# Altium PCB rs232_pic_print.PcbDoc
Units mm, origin at the board's own origin, x right, y up, seen from the top; angles counter-clockwise.
Board outline 152.4 x 101.6 mm, 2 copper layers (Top Layer, Bottom Layer); 39 components, 57 nets, 200 pads, 0 vias.
Unrouted connection lines stored in the file: 12.
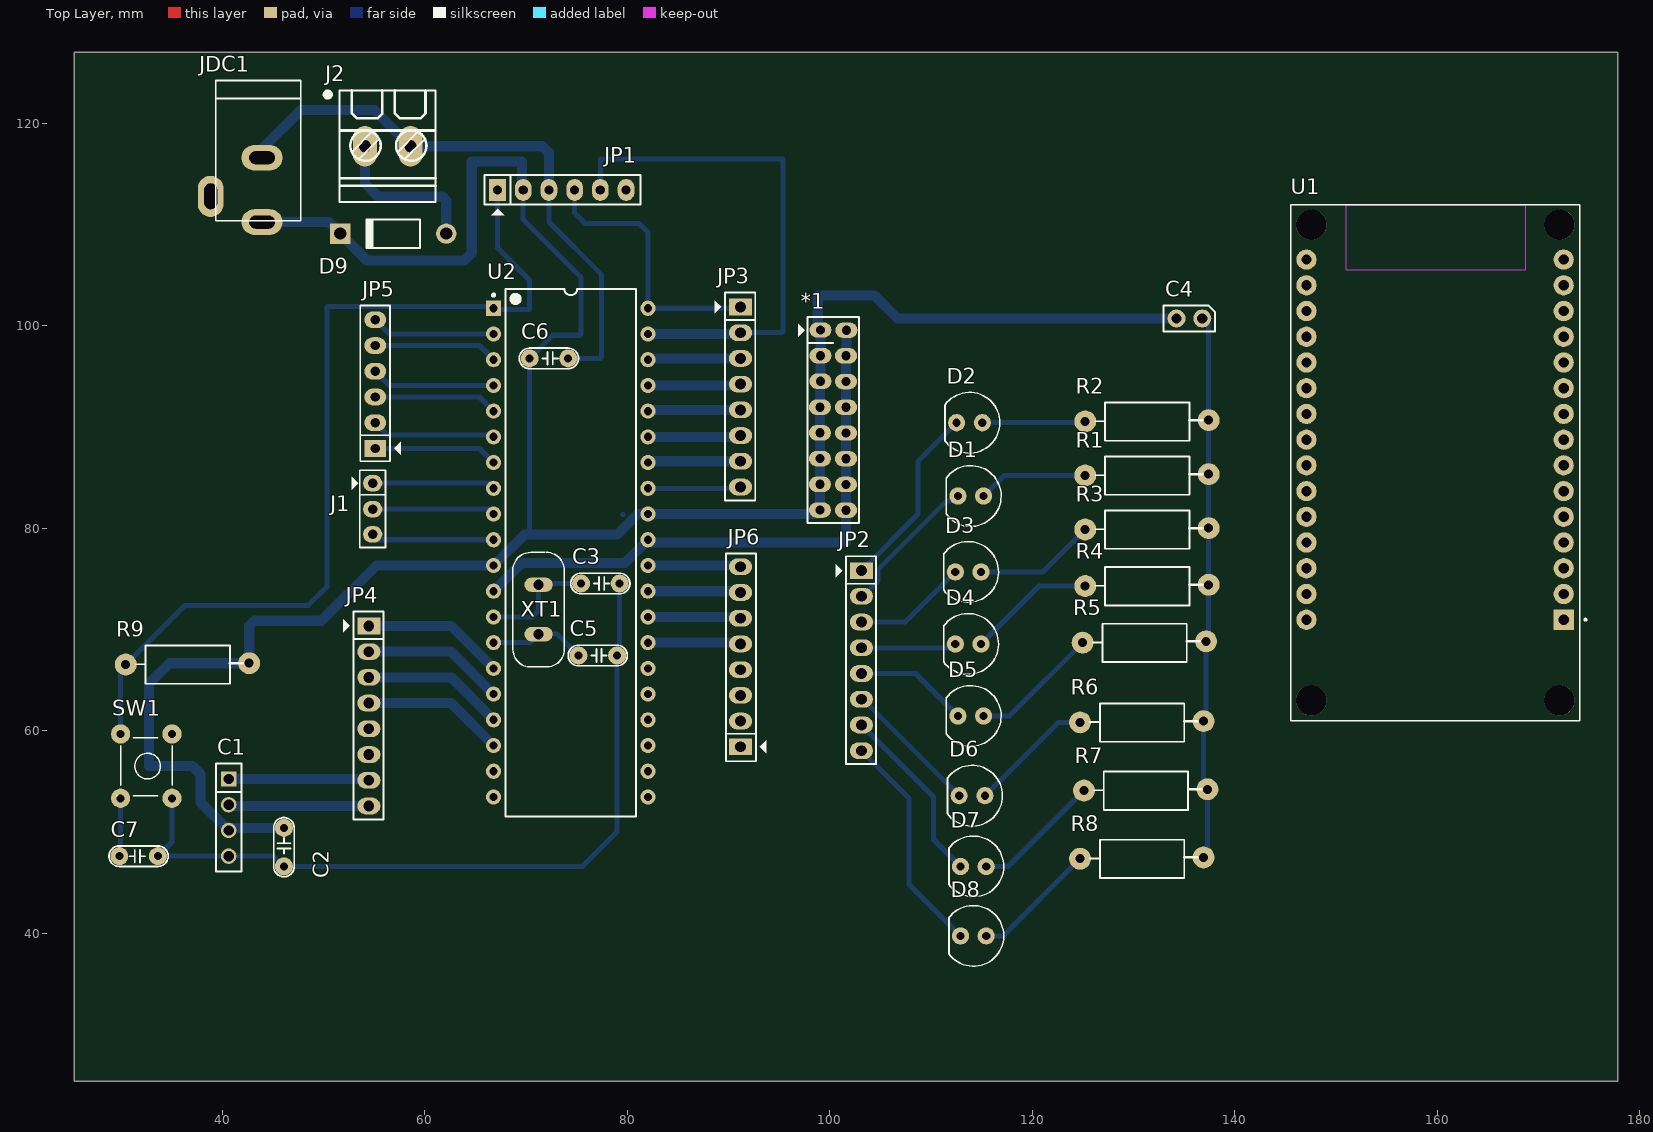
[diagram p0: Top Layer view]
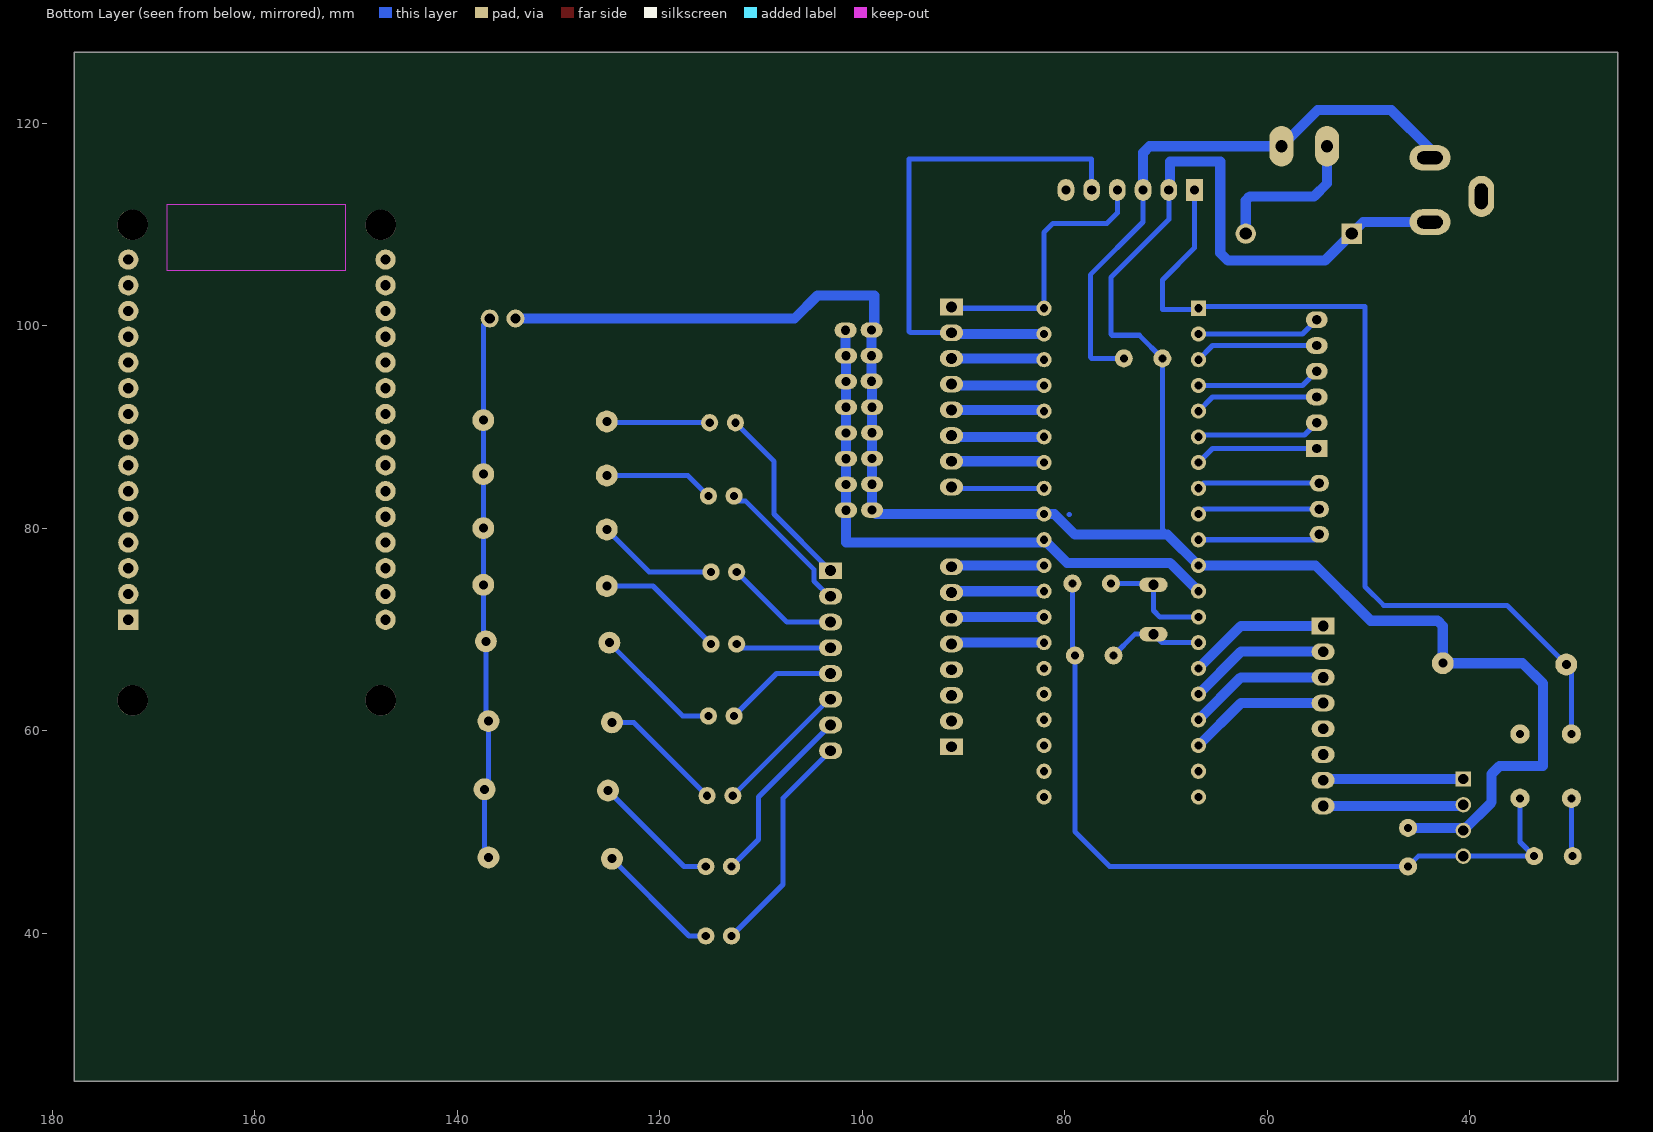
[diagram p1: Bottom Layer view, seen from below]
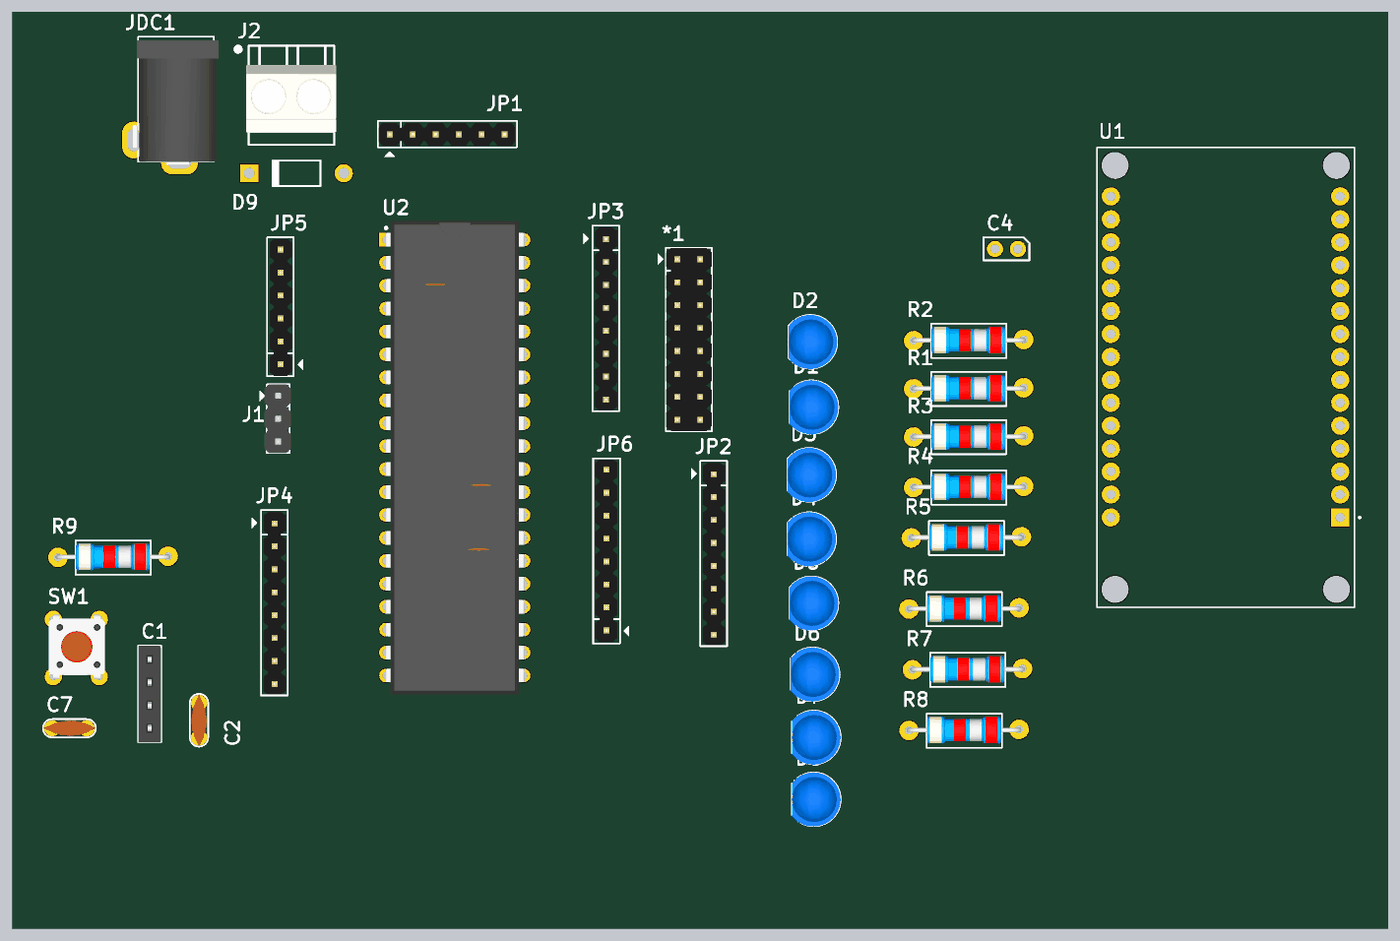
[diagram p2: 3D render of the assembled board from above, using the file's embedded part models]

## Layer stack, top to bottom
Top Solder: solder mask 0.0102, Solder Resist, Dk 3.5
Top Layer: signal copper 0.0356
Dielectric 1: dielectric 0.32, FR-4, Dk 4.8
Bottom Layer: signal copper 0.0356
Bottom Solder: solder mask 0.0102, Solder Resist, Dk 3.5

## Board outline
25.4,25.4 177.8,25.4 177.8,127 25.4,127

## Design rules (kind name [scope] priority, off if disabled: settings)
Clearance [All] p1: gap=0.254
PolygonConnect [All] p1: connectstyle=Relief reliefconductorwidth=0.254 reliefentries=4 polygonreliefangle="90 Angle" airgapwidth=0.254
RoutingLayers [All] p1: top layer_v5=FALSE bottom layer_v5=TRUE
RoutingVias [All] p1: holewidth=0.711 width=1.27 viastyle="Through Hole" minholewidth=0.711 minwidth=1.27 maxholewidth=0.711 maxwidth=1.27
SolderMaskExpansion [All] p1: expansion=0.102
Width [All] p1: maxlimit=3 minlimit=0.5 preferedwidth=1
29 further rules are at their usual default settings.

## Components (designator, comment, footprint, x,y, rotation, side; value= is the part's Value field where it differs from the comment)
*1 "JP8X2" JP8X2 99.06,99.568 r270 top
C1 "JP4" JP4-C1T 40.64,55.245 r270 top
C2 "103" CN1.5 46.101,48.641 r270 top
C3 "22p" CN1.5 77.47,74.549 r180 top
C4 "JP2" JP2-CLOSED 136.779,100.711 r270 top
C5 "22p" CN1.5 77.216,67.437 r180 top
C6 "103" CN1.5 72.39,96.774 r180 top
C7 "103" CN1.5 31.623,47.625 r0 top
D1 "LED" "LED-0 5mm BLUE" 113.919,83.185 r270 top
D2 "LED" "LED-0 5mm BLUE" 113.792,90.424 r270 top
D3 "LED" "LED-0 5mm BLUE" 113.665,75.692 r270 top
D4 "LED" "LED-0 5mm BLUE" 113.665,68.58 r270 top
D5 "LED" "LED-0 5mm BLUE" 113.919,61.468 r270 top
D6 "LED" "LED-0 5mm BLUE" 114.046,53.594 r270 top
D7 "LED" "LED-0 5mm BLUE" 114.173,46.609 r270 top
D8 "LED" "LED-0 5mm BLUE" 114.173,39.751 r270 top
D9 "Diode 1N4007" DO-41 56.896,109.093 r180 top
J1 "Jumper 3" JP3 54.864,81.915 r270 top
J2 "CON.Domino2" "Domino 2M" 61.077,112.229 r90 top
JDC1 "Jac DC" DC0 41.402,113.411 r270 top
JP1 "JP6 PIN" JP6 67.183,113.411 r0 top
JP2 "JP8 PIN" JP8 103.124,75.819 r270 top
JP3 "JP8 PIN" JP8 91.186,101.854 r270 top
JP4 "JP8 PIN" JP8 54.483,70.358 r270 top
JP5 "JP6 PIN" JP6 55.118,87.884 r90 top
JP6 "JP8 PIN" JP8 91.186,58.42 r90 top
R1 "220" RES-1/2W 131.826,85.217 r180 top
R2 "220" RES-1/2W 131.826,90.551 r180 top
R3 "220" RES-1/2W 131.826,79.883 r180 top
R4 "220" RES-1/2W 131.826,74.295 r180 top
R5 "220" RES-1/2W 131.572,68.707 r180 top
R6 "220" RES-1/2W 131.318,60.833 r180 top
R7 "220" RES-1/2W 131.699,54.102 r180 top
R8 "220" RES-1/2W 131.318,47.371 r180 top
R9 "Res" RES-1/2W 37.084,66.548 r180 top
SW1 "SW" SW2-DIP 35.052,59.69 r270 top
U1 "ESP32-DEVKIT-V1" MODULE_ESP32_DEVKIT_V1 159.766,86.487 r180 top
U2 "PIC16F877A-I/P" DIP-40 74.422,77.597 r0 top
XT1 "Crystal2" Crystal.HC49_N 71.247,69.545 r180 top

## Footprints (in the part's own frame and the unit in brackets; to place one, negate y for a bottom-side part, rotate by r counter-clockwise, add the part's x,y. Pads: shape width x height; smd on the part's side, far side on the other; paste and mask are expansions set on the pad)
CN1.5 [mil]
  round 70 hole 31: 1(-70,0) 2(80,0)
  silkscreen extent -110,-40 120,40, body extent -110,-33 120,33, height 235
Crystal.HC49_N [mil] "HC49USxx package"
  rrect100% 110x56 hole 40: 1(0,0) 2(0,-192)
  silkscreen extent -100,-318 100,127, body extent -90,-319 93,127, height 157
DC0 [mil] "Jac DC input"
  oval 100x160 hole 50 slot 100 at 90 deg: 1(125,100) 2(-125,100)
  oval 160x100 hole 50 slot 100 at 0 deg: 3(25,-100)
  silkscreen extent -425,-80 120,250, body extent -410,-105 134,269, height 434
DIP-40 [mm] "DIP, 40-Pin, Row Spacing 15.24 mm, Pitch 2.54 mm"
  rect 1.5x1.5 hole 0.813: 1(-7.62,24.13)
  round 1.5 hole 0.813: 2(-7.62,21.59) 3(-7.62,19.05) 4(-7.62,16.51) 5(-7.62,13.97) 6(-7.62,11.43) 7(-7.62,8.89) 8(-7.62,6.35) 9(-7.62,3.81) 10(-7.62,1.27) 11(-7.62,-1.27) 12(-7.62,-3.81) 13(-7.62,-6.35) 14(-7.62,-8.89) 15(-7.62,-11.43) 16(-7.62,-13.97) 17(-7.62,-16.51) 18(-7.62,-19.05) 19(-7.62,-21.59) 20(-7.62,-24.13) 21(7.62,-24.13) 22(7.62,-21.59) 23(7.62,-19.05) 24(7.62,-16.51) 25(7.62,-13.97) 26(7.62,-11.43) 27(7.62,-8.89) 28(7.62,-6.35) 29(7.62,-3.81) 30(7.62,-1.27) 31(7.62,1.27) 32(7.62,3.81) 33(7.62,6.35) 34(7.62,8.89) 35(7.62,11.43) 36(7.62,13.97) 37(7.62,16.51) 38(7.62,19.05) 39(7.62,21.59) 40(7.62,24.13)
  silkscreen extent -7.74,-26.05 6.45,26.05, body extent -7.75,-26.22 7.74,26.23, height 5.7
DO-41 [mm] "Diode, Axial; Body 5.2 x 2.7 mm (LxDia. max), Lead Dia. 0.86 mm (max)"
  round 2 hole 1.2: 1(-5.23,0)
  rect 2x2 hole 1.2: 2(5.23,0)
  silkscreen extent -2.65,-1.4 2.75,1.4
"Domino 2M" [mm]
  oval 4x2.4 hole 1.2: 1(5.5,6.975) 2(5.5,2.475)
  silkscreen extent 0,0 11,10.9, body extent 1.35,-0.22 8.85,9.78, height 10
JP2-CLOSED [mil]
  round 70 hole 40: 1(0,0) 2(0,-100)
  silkscreen extent -50,-150 50,50, body extent -50,-152 50,50, height 300
JP3 [mil] "Jumper 3"
  oval 65x75 hole 36: 1(-100,0) 2(1,0) 3(99,0)
  silkscreen extent -150,-81 150,50, body extent -150,-60 150,55, height 355
JP4-C1T [mm] "4 row, straight, gold plating"
  rect 1.52x1.52 hole 1.02: 1(0,0)
  round 1.52 hole 1.02: 2(2.54,0) 3(5.08,0) 4(7.62,0)
  silkscreen extent -1.52,-1.27 9.14,1.27, body extent -1.52,-1.25 9.14,1.25, height 8.51
JP6 [mil] "JP6"
  rect 65x85 hole 36: 1(0,0)
  oval 65x85 hole 36: 2(100,0) 3(200,0) 4(300,0) 5(400,0) 6(500,0)
  silkscreen extent -50,-99 556,58, body extent -48,-50 548,48, height 323
JP8 [mil] "JP8"
  rect 65x90 hole 42: 1(0,0)
  oval 65x90 hole 42: 2(100,0) 3(200,0) 4(300,0) 5(400,0) 6(500,0) 7(600,0) 8(700,0)
  silkscreen extent -56,-100 752,57, body extent -48,-50 748,48, height 323
JP8X2 [mil]
  oval 60x86 hole 36: 1(-0.5,0.5) 2(99.5,0.5) 3(198.5,0.5) 4(299.5,-1.5) 5(399.5,-1.5) 6(499.5,-1.5) 7(599.5,-1.5) 8(699.5,-1.5) 9(0.5,101.5) 10(100,100) 11(200,100) 12(300,100) 13(400,100) 14(500,100) 15(600,100) 16(700,100)
  silkscreen extent -51,-85 750,151, body extent -50,-50 750,150, height 335
"LED-0 5mm BLUE" [mil] "Typical LED; BLUE; 2 Leads; Solder Pad 35mil"
  round 67 hole 32: 1(0,50) 2(0,-50)
  silkscreen extent -118,-96 118,118, body extent -118,-96 119,117, height 345
MODULE_ESP32_DEVKIT_V1 [mm]
  rect 2x2 hole 1.02: 1(-12.7,15.515)
  round 2 hole 1.02: 2(-12.7,12.975) 3(-12.7,10.435) 4(-12.7,7.895) 5(-12.7,5.355) 6(-12.7,2.815) 7(-12.7,0.275) 8(-12.7,-2.265) 9(-12.7,-4.805) 10(-12.7,-7.345) 11(-12.7,-9.885) 12(-12.7,-12.425) 13(-12.7,-14.965) 14(-12.7,-17.505) 15(-12.7,-20.045) 16(12.7,-20.045) 17(12.7,-17.505) 18(12.7,-14.965) 19(12.7,-12.425) 20(12.7,-9.885) 21(12.7,-7.345) 22(12.7,-4.805) 23(12.7,-2.265) 24(12.7,0.275) 25(12.7,2.815) 26(12.7,5.355) 27(12.7,7.895) 28(12.7,10.435) 29(12.7,12.975) 30(12.7,15.515)
  round 3 hole 3 unplated: ""(-12.28,23.475) ""(-12.28,-23.475) ""(12.23,23.475) ""(12.23,-23.475)
  Keep-Out Layer region: 8.78,-25.475 -8.91,-25.475 -8.91,-18.985 8.78,-18.985
  Keep-Out Layer region: 8.78,-25.475 -8.91,-25.475 -8.91,-18.985 8.78,-18.985
  Keep-Out Layer region: 8.78,-25.475 -8.91,-25.475 -8.91,-18.985 8.78,-18.985
  silkscreen extent -14.95,-25.48 14.23,25.48
RES-1/2W [mil]
  round 85 hole 35: 1(-220,-5) 2(260,0)
  silkscreen extent -195,-74 221,75, body extent -230,-60 270,56, height 121
SW2-DIP [mil] "SW button 4pin, 250 x250 mil"
  round 75 hole 31: 1(0,0) 2(0,-200) 3(250,-200) 4(250,0)
  silkscreen extent 15,-215 240,0, body extent -36,-220 276,24, height 276

## Part data
C1 C4: "WR-PHD 2.54 mm Angled Socket Header"
C2 C3 C5 C6 C7: library part CN1.5, "Cap np 682pF => 104pF"
D1 D2 D3 D4 D5 D6 D7 D8: "Typical LED"
D9: "1 Amp General Purpose Rectifier"
J1: library part JP3
J2: "2 pins Domino Header"
JDC1: library part DCIN, "Jac DC input"
JP1 JP5: library part JP6
JP2 JP3 JP4 JP6: library part JP8
R1 R2 R3 R4 R5 R6 R7 R8: library part Res, "Res"
SW1: library part SW4, "Switch button 4 pin"
U1: "Dual core, Wi-Fi: 2.4 GHz up to 150 Mbits/s,BLE (Bluetooth Low Energy) and legacy Bluetooth, 32 bits, Up to 240 MHz"
U2: "Enhanced FLASH Microcontroller, 8K (x14-Bit words) FLASH, 368 Bytes RAM, 40-Pin PDIP, Standard VDD Range, Industrial Temperature"
XT1: "Quarz Crystal"

## Nets (pads, with @x,y where several pads share a name; then routed paths per layer and width w, separated by ;. In a path a pad name is that pad's centre, name@x,y a point inside that pad or via, vN(x,y) a via of type N, cw(c..) or ccw(c..) an arc to the next point about the centre after c; other vN are vias at no path point)
+5: *1.1 *1.2 *1.3 *1.4 *1.5 *1.6 *1.7 *1.8 C1.3 C2.1 C4.2 C6.2 D9.2 JDC1.1 JP1.2 R9.1 U2.11 U2.32 | length 238.8
  Bottom Layer w0.5: JP1.2 69.723,110.49 75.438,104.775 75.438,99.187 75.311,99.06 72.644,99.06 C6.2 70.358,79.883 69.85,79.375
  Bottom Layer w1: JDC1.1 50.523,110.236 D9.2 54.333,106.426 63.881,106.426 64.643,107.188 64.643,116.205 69.596,116.205 69.596,113.538 JP1.2 ; C2.1 40.894,50.419 C1.3 37.846,52.959 37.846,55.753 37.084,56.515 32.766,56.515 32.766,64.643 34.798,66.675 R9.1 42.672,70.358 43.18,70.866 49.784,70.866 55.245,76.327 U2.11 69.85,79.375 78.994,79.375 81.026,81.407 U2.32 98.628,81.407 *1.8 *1.7 *1.6 *1.5 *1.4 99.022,94.475 *1.3 *1.2 *1.1 98.806,99.847 98.806,102.997 104.394,102.997 106.68,100.711 C4.2
GND: C1.4 C2.2 C3.1 C5.1 C7.2 SW1.1 SW1.4 | length 78.1
  Bottom Layer w0.5: SW1.4 35.052,49.022 C7.2 C1.4 45.085,47.625 C2.2 75.565,46.609 78.994,50.038 C5.1 79.248,67.691 C3.1
Net*1_9: *1.9 *1.10 *1.11 *1.12 *1.13 *1.14 *1.15 *1.16 C6.1 J2.2 JDC1.2 JP1.3 U2.12 U2.31 | length 116.8
  Bottom Layer w0.254: JDC1.2 44.196,116.586 JDC1.2@44.45,116.332
  Bottom Layer w0.5: JP1.3 72.263,110.236 77.47,105.029 77.47,96.901 77.343,96.774 C6.1
  Bottom Layer w1: JDC1.2 43.942,117.475 47.752,121.285 55.046,121.285 J2.2 71.628,117.729 72.263,117.094 JP1.3 ; U2.12 69.596,76.581 79.756,76.581 U2.31 82.296,78.613 101.6,78.613 *1.16 *1.15 *1.14 *1.13 *1.12 *1.11 *1.10 101.638,97.066 *1.9
NetC1_1: C1.1 JP4.7 U2.25 | length 13.9
  Bottom Layer w1: C1.1 54.356,55.245 JP4.7
NetC1_2: C1.2 JP4.8 U2.26 | length 13.9
  Bottom Layer w1: C1.2 40.767,52.578 JP4.8
NetC3_2: C3.2 U2.13 XT1.2 | length 11.5
  Bottom Layer w0.5: U2.13 70.612,71.247 71.247,71.882 XT1.2 71.374,74.549 C3.2
NetC4_1: C4.1 R1.1 R2.1 R3.1 R4.1 R5.1 R6.1 R7.1 R8.1 | length 54
  Bottom Layer w0.5: C4.1 137.414,100.076 R2.1 R1.1 R3.1 R4.1 137.414,69.088 R5.1 137.16,61.214 R6.1 136.906,54.61 R7.1 137.287,47.879 R8.1
NetC5_2: C5.2 U2.14 XT1.1 | length 9.6
  Bottom Layer w0.5: U2.14 70.409,68.707 XT1.1 73.076,69.545 C5.2
NetC7_1: C7.1 JP1.1 R9.2 SW1.2 SW1.3 U2.1 | length 96.9
  Bottom Layer w0.5: C7.1 29.972,47.752 SW1.3 ; SW1.2 29.972,66.04 R9.2 36.322,72.39 48.514,72.39 50.36,74.236 50.36,101.913 66.802,101.913 U2.1 66.929,101.6 70.358,101.6 70.358,104.521 67.183,107.696 JP1.1
NetD1_1: D1.1 R1.2 | length 10.9
  Bottom Layer w0.5: D1.1 117.221,85.217 R1.2
NetD1_2: D1.2 JP2.2 | length 14.3
  Bottom Layer w0.5: JP2.2 103.265,73.279 104.771,74.785 104.771,75.942 111.506,82.677 112.141,82.677 D1.2
NetD2_1: D2.1 R2.2 | length 10.2
  Bottom Layer w0.5: D2.1 125.095,90.424 R2.2
NetD2_2: D2.2 JP2.1 | length 18.5
  Bottom Layer w0.5: JP2.1 108.712,81.407 108.712,86.614 D2.2
NetD3_1: D3.1 R3.2 | length 12
  Bottom Layer w0.5: D3.1 121.031,75.692 R3.2
NetD3_2: D3.2 JP2.3 | length 11.3
  Bottom Layer w0.5: JP2.3 107.442,70.739 D3.2
NetD4_1: D4.1 R4.2 | length 12.7
  Bottom Layer w0.5: D4.1 120.65,74.295 R4.2
NetD4_2: D4.2 JP2.4 | length 9.4
  Bottom Layer w0.5: JP2.4 112.014,68.199 D4.2
NetD5_1: D5.1 R5.2 | length 12.8
  Bottom Layer w0.5: D5.1 117.729,61.468 R5.2
NetD5_2: D5.2 JP2.5 | length 11.3
  Bottom Layer w0.5: JP2.5 108.458,65.659 D5.2
NetD6_1: D6.1 R6.2 | length 12.4
  Bottom Layer w0.5: D6.1 122.555,60.833 R6.2
NetD6_2: D6.2 JP2.6 | length 13.6
  Bottom Layer w0.5: JP2.6 103.251,63.119 D6.2
NetD7_1: D7.1 R7.2 | length 12.8
  Bottom Layer w0.5: D7.1 117.602,46.609 R7.2
NetD7_2: D7.2 JP2.7 | length 18
  Bottom Layer w0.5: JP2.7 110.236,53.467 110.236,49.276 D7.2
NetD8_1: D8.1 R8.2 | length 12.4
  Bottom Layer w0.5: D8.1 117.094,39.751 R8.2
NetD8_2: D8.2 JP2.8 | length 22.3
  Bottom Layer w0.5: JP2.8 107.823,53.34 107.823,44.831 D8.2
NetD9_1: D9.1 J2.1 | length 15.7
  Bottom Layer w1: J2.1 54.102,114.046 55.372,112.776 61.722,112.776 62.126,112.372 D9.1
NetJ1_1: J1.1 U2.8 | length 12.1
  Bottom Layer w0.5: J1.1 66.294,84.455 U2.8
NetJ1_2: J1.2 U2.9 | length 12.1
  Bottom Layer w0.5: J1.2 66.319,81.89 U2.9
NetJ1_3: J1.3 U2.10 | length 12.2
  Bottom Layer w0.5: J1.3 55.397,78.867 U2.10
NetJP1_4: JP1.4 JP3.1 U2.40 | length 27
  Bottom Layer w0.5: JP1.4 74.803,111.125 75.819,110.109 81.153,110.109 82.042,109.22 U2.40 91.059,101.727 JP3.1
NetJP1_5: JP1.5 JP3.2 U2.39 | length 51.5
  Bottom Layer w0.5: JP1.5 77.343,116.459 95.377,116.459 95.377,99.441 95.25,99.314 JP3.2
  Bottom Layer w1: U2.39 91.059,99.187 JP3.2
NetJP3_3: JP3.3 U2.38 | length 9.2
  Bottom Layer w1: U2.38 82.169,96.774 JP3.3
NetJP3_4: JP3.4 U2.37 | length 9.2
  Bottom Layer w1: U2.37 91.059,94.107 JP3.4
NetJP3_5: JP3.5 U2.36 | length 9.2
  Bottom Layer w1: U2.36 82.169,91.694 JP3.5
NetJP3_6: JP3.6 U2.35 | length 9.2
  Bottom Layer w1: U2.35 91.059,89.027 JP3.6
NetJP3_7: JP3.7 U2.34 | length 9.2
  Bottom Layer w1: U2.34 82.169,86.614 JP3.7
NetJP3_8: JP3.8 U2.33 | length 9.2
  Bottom Layer w0.5: U2.33 91.059,83.947 JP3.8
NetJP4_1: JP4.1 U2.15 | length 14.1
  Bottom Layer w1: JP4.1 62.611,70.358 U2.15
NetJP4_2: JP4.2 U2.16 | length 14.1
  Bottom Layer w1: JP4.2 62.611,67.818 U2.16
NetJP4_3: JP4.3 U2.17 | length 14.1
  Bottom Layer w1: JP4.3 62.611,65.278 U2.17
NetJP4_4: JP4.4 U2.18 | length 14.1
  Bottom Layer w1: JP4.4 62.611,62.738 U2.18
NetJP4_5: JP4.5 U2.23
NetJP4_6: JP4.6 U2.24
NetJP5_1: JP5.1 U2.7 | length 12.3
  Bottom Layer w0.5: JP5.1 65.405,87.884 U2.7
NetJP5_2: JP5.2 U2.6 | length 12.4
  Bottom Layer w0.5: JP5.2 56.329,89.213 66.802,89.213 U2.6
NetJP5_3: JP5.3 U2.5 | length 12.3
  Bottom Layer w0.5: JP5.3 65.405,92.964 U2.5
NetJP5_4: JP5.4 U2.4 | length 12.3
  Bottom Layer w0.5: JP5.4 56.515,94.107 U2.4
NetJP5_5: JP5.5 U2.3 | length 12.3
  Bottom Layer w0.5: JP5.5 65.405,98.044 U2.3
NetJP5_6: JP5.6 U2.2 | length 12.3
  Bottom Layer w0.5: JP5.6 56.515,99.187 U2.2
NetJP6_1: JP6.1 U2.19
NetJP6_2: JP6.2 U2.20
NetJP6_3: JP6.3 U2.21
NetJP6_4: JP6.4 U2.22
NetJP6_5: JP6.5 U2.27 | length 9.2
  Bottom Layer w1: U2.27 91.059,68.707 JP6.5
NetJP6_6: JP6.6 U2.28 | length 9.2
  Bottom Layer w1: U2.28 91.059,71.247 JP6.6
NetJP6_7: JP6.7 U2.29 | length 9.2
  Bottom Layer w1: U2.29 91.059,73.787 JP6.7
NetJP6_8: JP6.8 U2.30 | length 9.2
  Bottom Layer w1: U2.30 91.059,76.327 JP6.8
pads on no net: JDC1.3 JP1.6 U1. U1.1 U1.2 U1.3 U1.4 U1.5 U1.6 U1.7 U1.8 U1.9 U1.10 U1.11 U1.12 U1.13 U1.14 U1.15 U1.16 U1.17 U1.18 U1.19 U1.20 U1.21 U1.22 U1.23 U1.24 U1.25 U1.26 U1.27 U1.28 U1.29 U1.30